# Altium PCB PCB_HBridge.PcbDoc
Units mm, origin at the board's own origin, x right, y up, seen from the top; angles counter-clockwise.
Board outline 66.04 x 61.85 mm, 2 copper layers (Top Layer, Bottom Layer); 46 components, 32 nets, 139 pads, 137 vias.
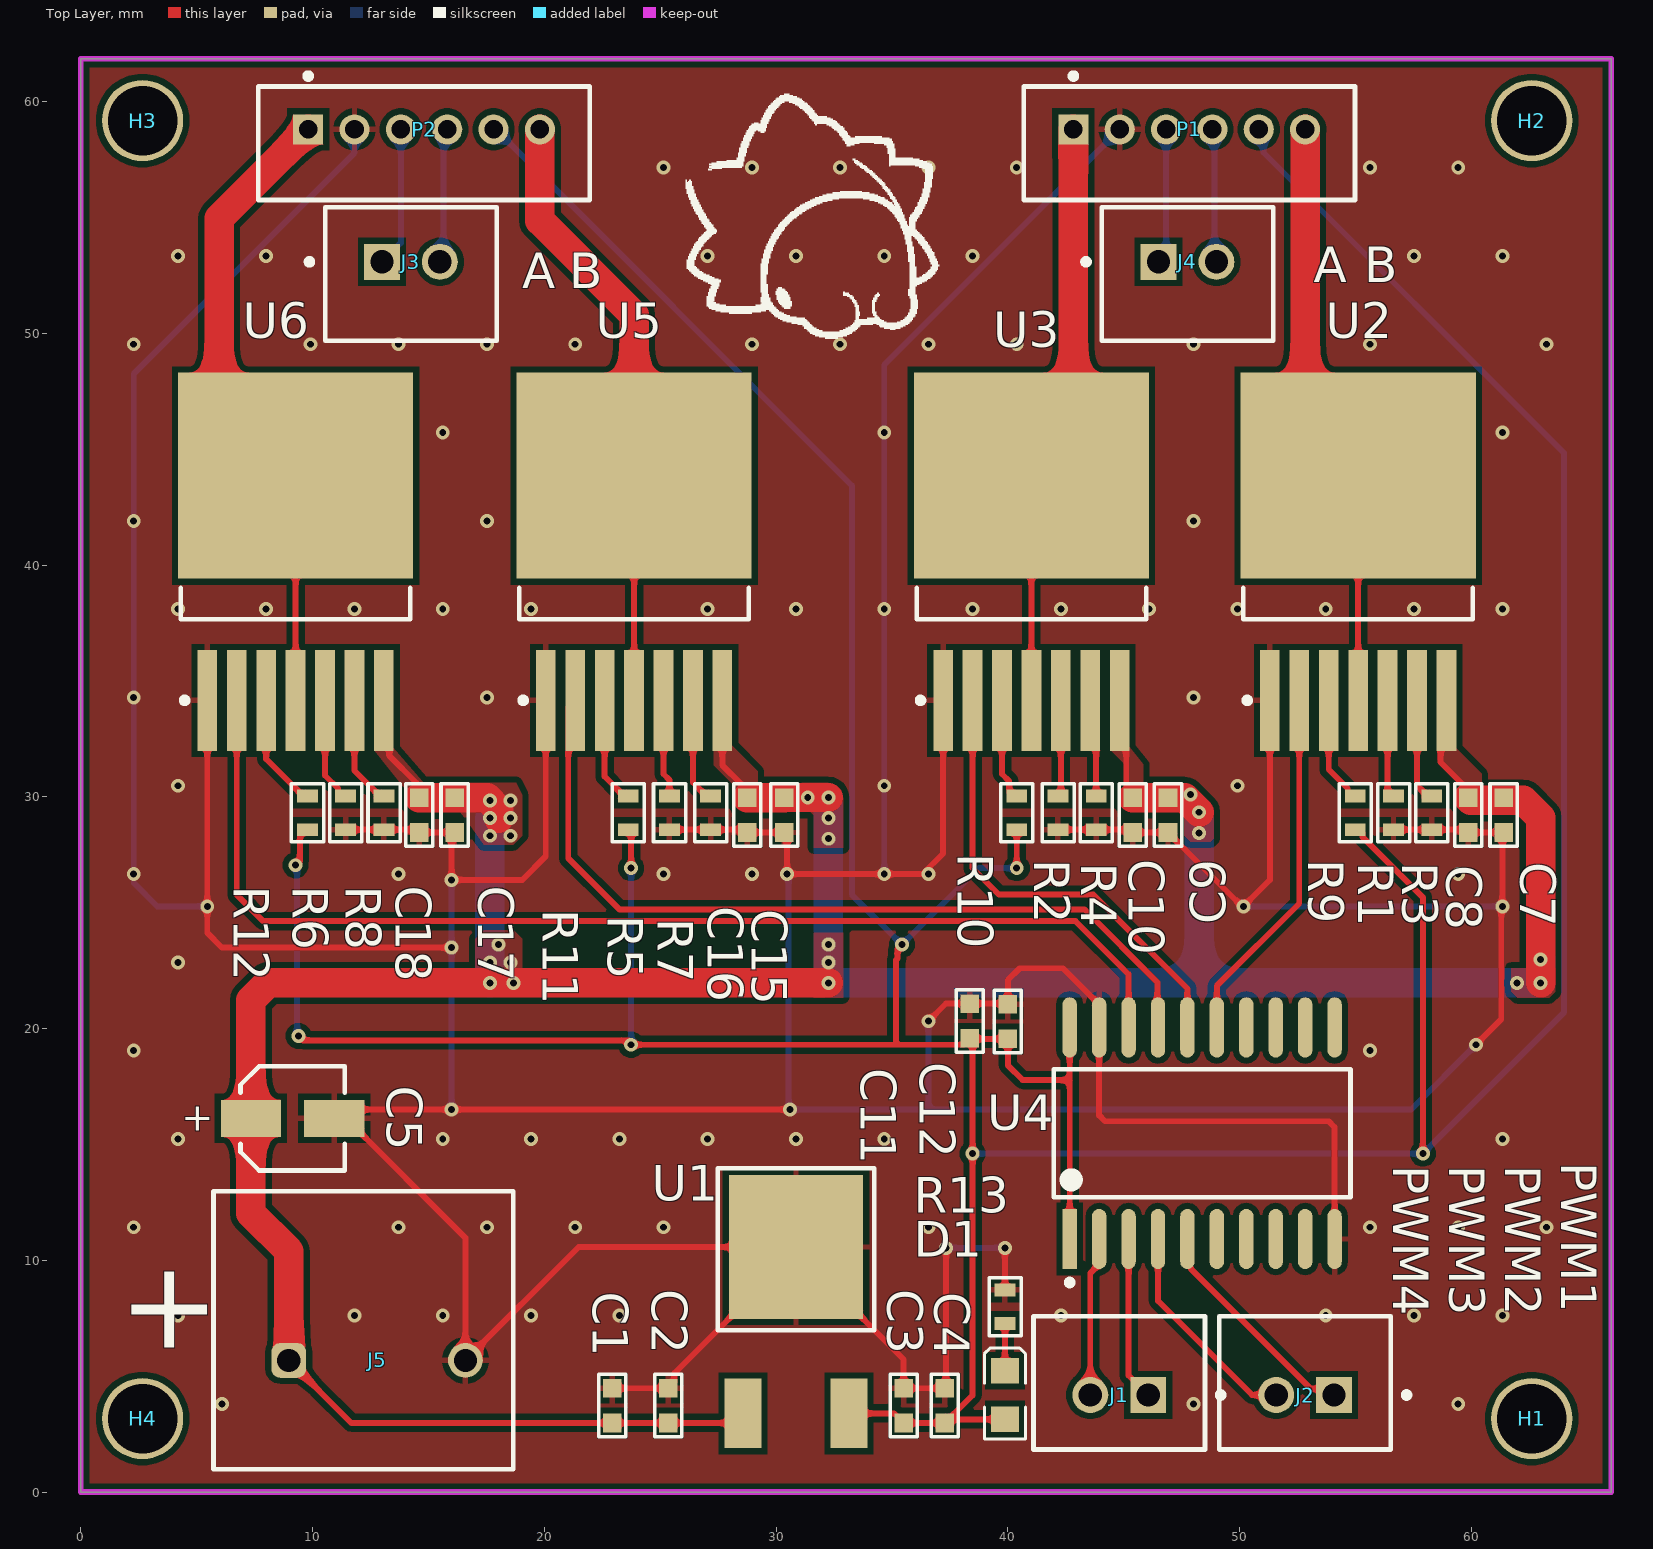
[diagram p0: Top Layer view]
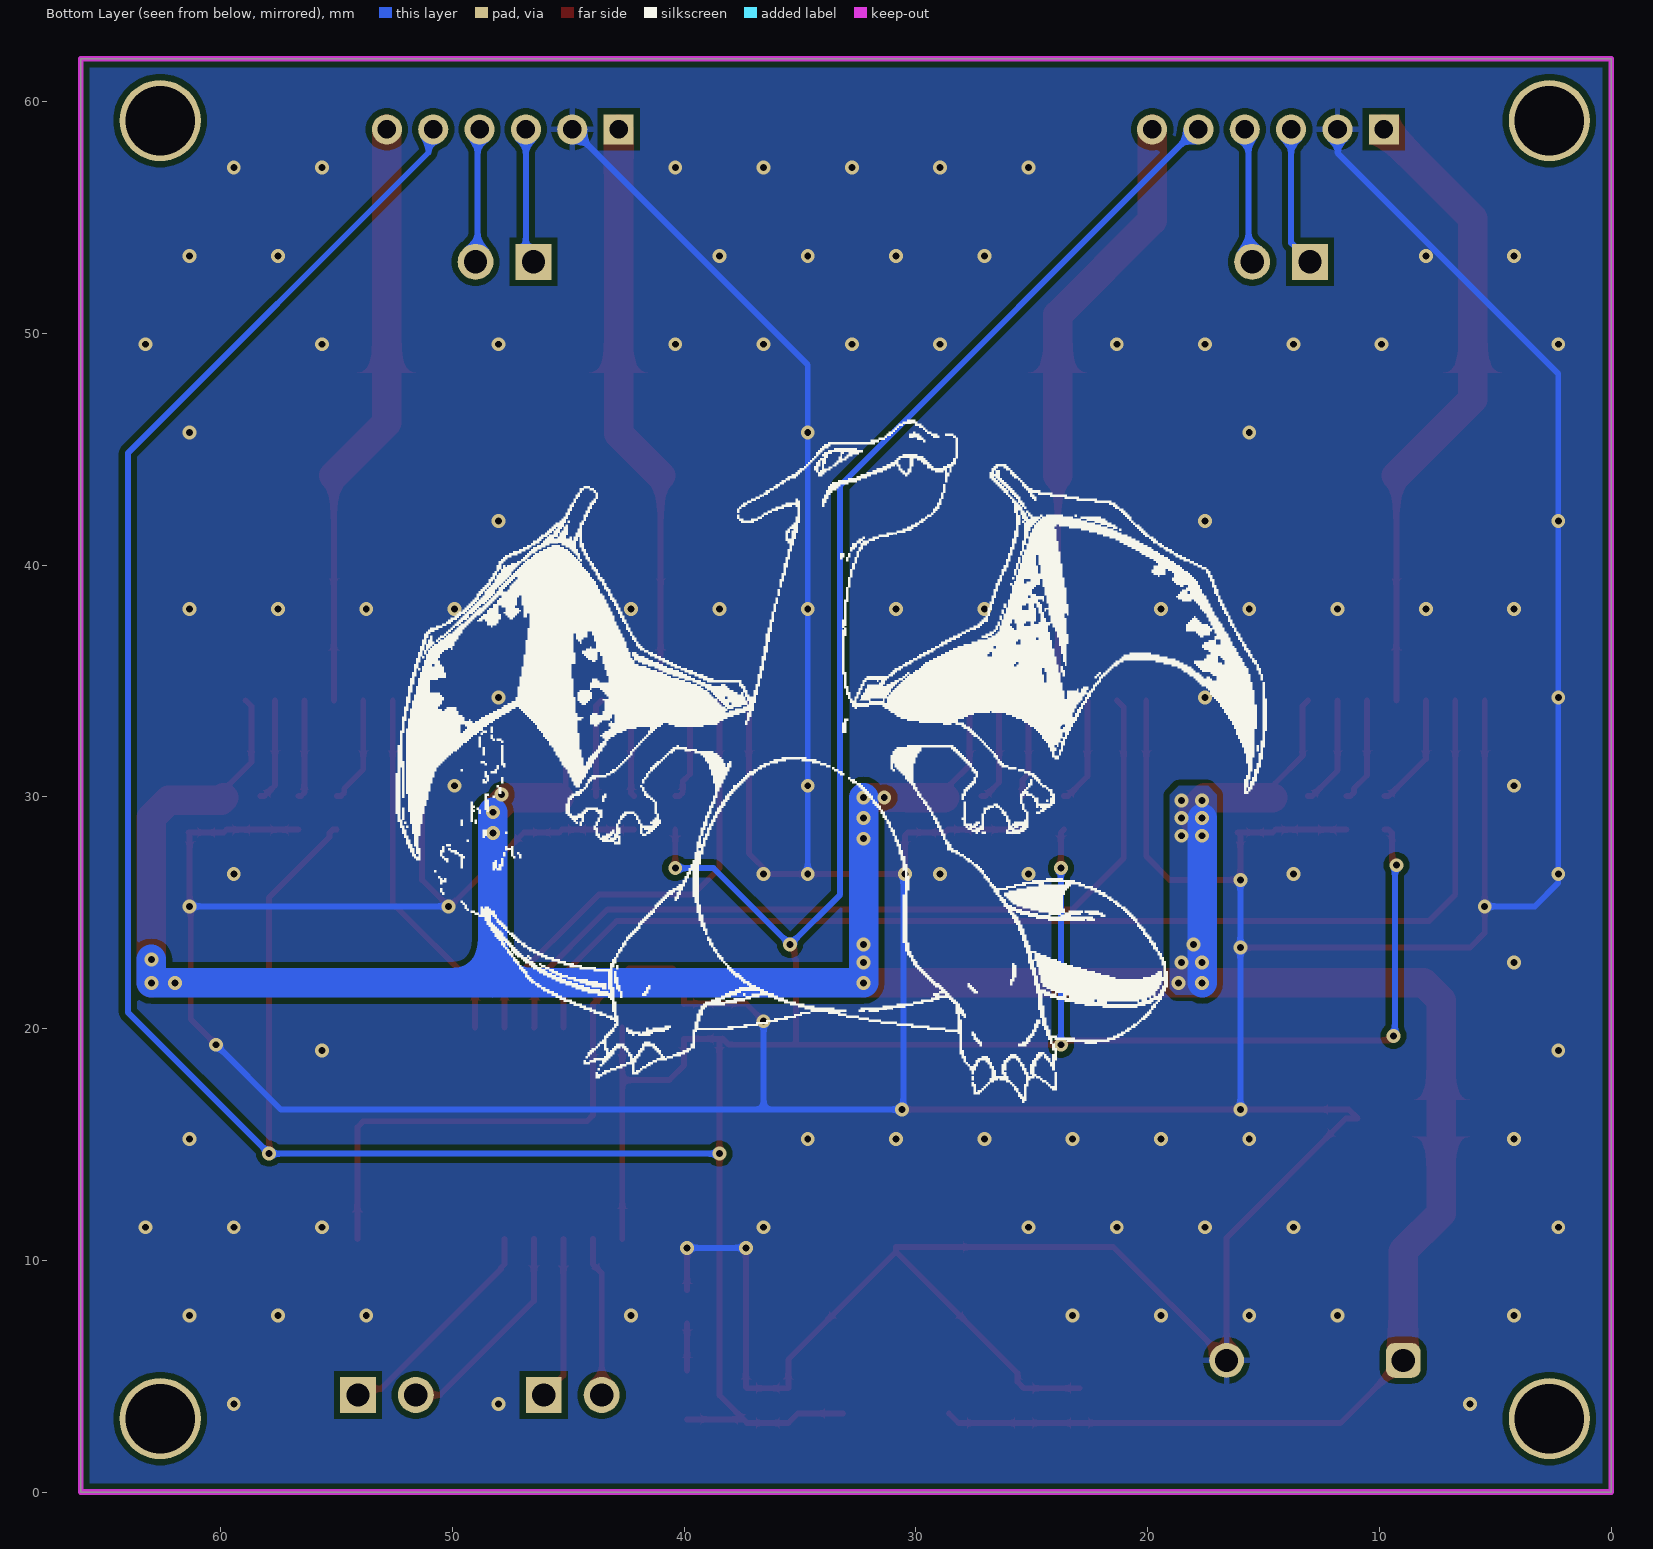
[diagram p1: Bottom Layer view, seen from below]
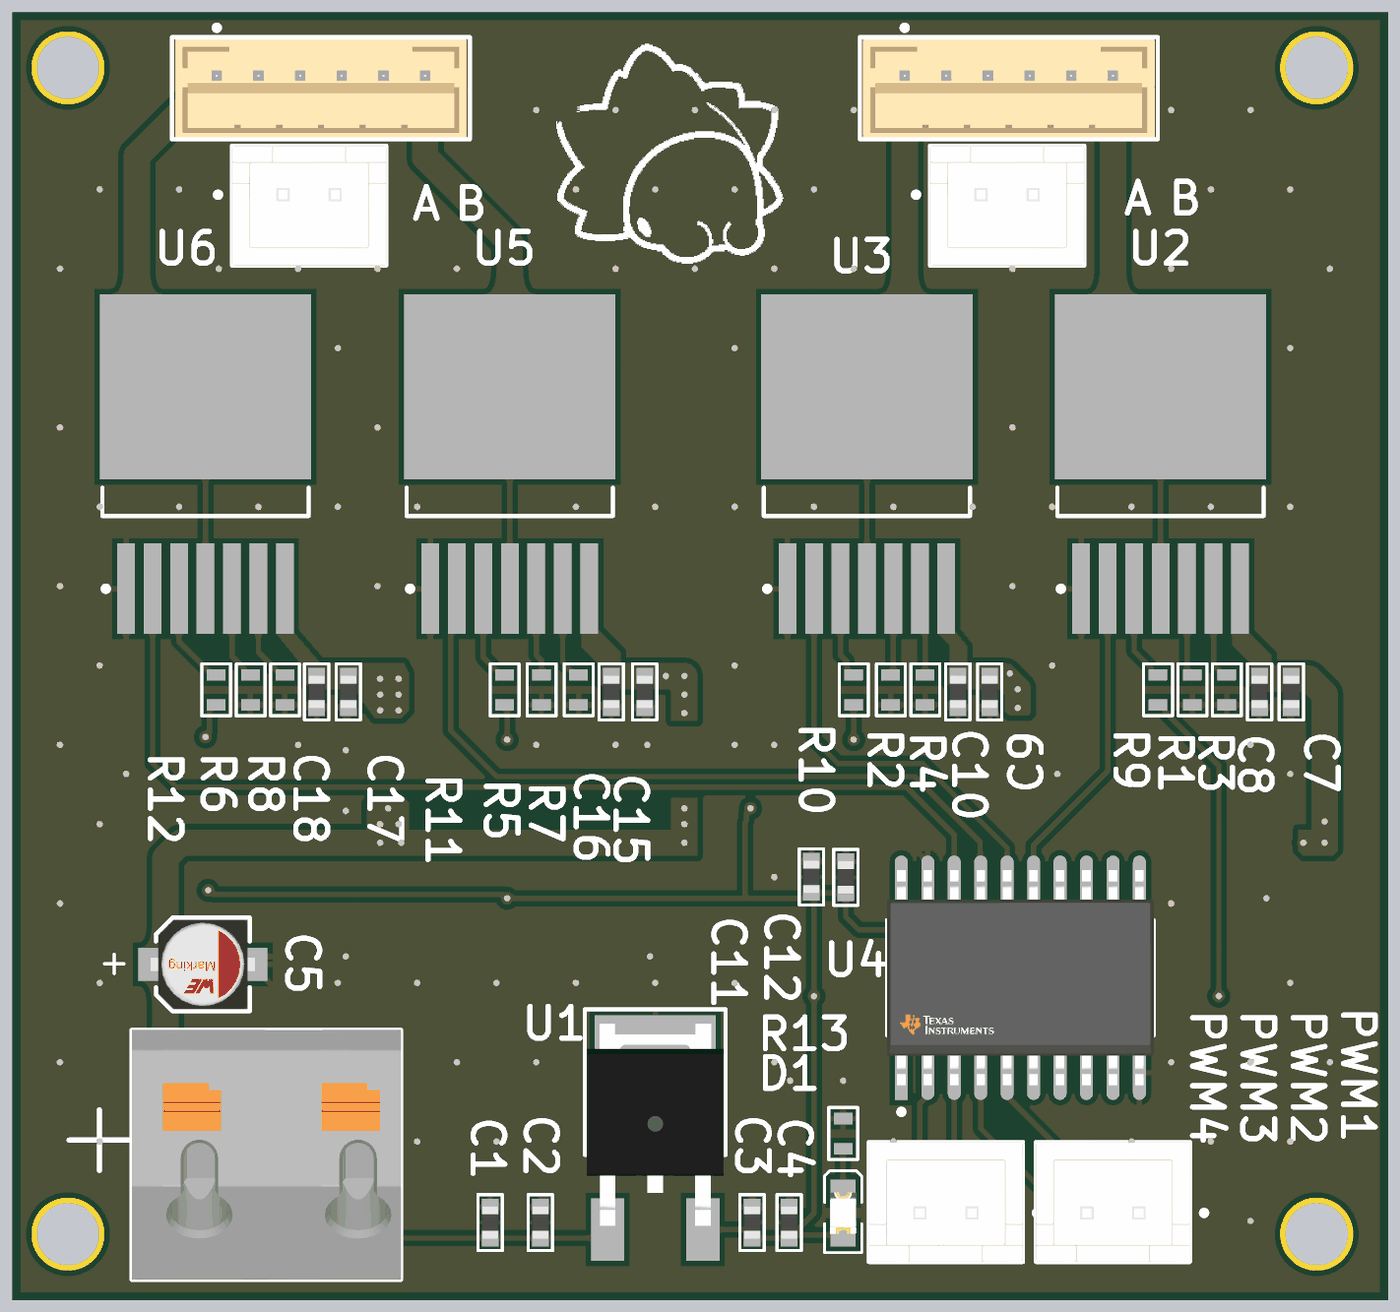
[diagram p2: 3D render of the assembled board from above, using the file's embedded part models]

## Layer stack, top to bottom
Top Solder: solder mask 0.0102, Solder Resist, Dk 3.5
Top Layer: signal copper 0.0356
Dielectric 1: dielectric 0.32, FR-4, Dk 4.8
Bottom Layer: signal copper 0.0356
Bottom Solder: solder mask 0.0102, Solder Resist, Dk 3.5

## Board outline
0,0 0,61.849 66.04,61.849 66.04,0

## Design rules (kind name [scope] priority, off if disabled: settings)
Clearance [All] p1: gap=0.254 ignorepadtopadclearanceinfootprint=FALSE except(0: Arc-Hole Track-Hole SMDPad-Hole THPad-Hole Via-Hole Fill-Hole Poly-Hole Region-Hole Text-Hole)
PolygonConnect [All] p1: thpad.connectstyle=Relief thpad.reliefconductorwidth=0.254 thpad.reliefentries=4 thpad.polygonreliefangle="90 Angle" thpad.airgapwidth=0.254 smdpad.connectstyle=Relief smdpad.reliefconductorwidth=0.254 smdpad.reliefentries=4 smdpad.polygonreliefangle="90 Angle" smdpad.airgapwidth=0.254 via.connectstyle=Direct via.reliefconductorwidth=0.254 via.reliefentries=4 via.polygonreliefangle="90 Angle" via.airgapwidth=0.254
RoutingVias [All] p1: holewidth=0.711 width=1.27 viastyle="Through Hole" minholewidth=0.711 minwidth=1.27 maxholewidth=0.711 maxwidth=1.27
SolderMaskExpansion Via [IsVia] p1: expansion=0.102 istentingtop=TRUE
Width [All] p1: maxlimit=1.27 minlimit=0.254 preferedwidth=0.254 minimp=50.000000 maximp=50.000000 favimp=50.000000
30 further rules are at their usual default settings.

## Components (designator, comment, footprint, x,y, rotation, side; value= is the part's Value field where it differs from the comment)
C1 "1 nF, 50 VDC" CAP_0603 22.86,3.683 r270 top
C2 "100 nF, 50 VDC" CAP_0603 25.273,3.683 r270 top
C3 "100 nF, 50 VDC" CAP_0603 35.433,3.683 r270 top
C4 "1 nF, 50 VDC" CAP_0603 37.211,3.683 r270 top
C5 "470nF" WCAP-ASLU_D4H5.5 9.144,16.129 r180 top
C7 "1 nF, 50 VDC" CAP_0603 61.468,29.264 r90 top
C8 "100 nF, 50 VDC" CAP_0603 59.944,29.264 r90 top
C9 "1 nF, 50 VDC" CAP_0603 46.99,29.264 r90 top
C10 "100 nF, 50 VDC" CAP_0603 45.466,29.264 r90 top
C11 "1 nF, 50 VDC" CAP_0603 38.278,20.281 r270 top
C12 "100 nF, 50 VDC" CAP_0603 39.929,20.257 r270 top
C15 "1 nF, 50 VDC" CAP_0603 30.429,29.264 r90 top
C16 "100 nF, 50 VDC" CAP_0603 28.829,29.264 r90 top
C17 "1 nF, 50 VDC" CAP_0603 16.205,29.264 r90 top
C18 "100 nF, 50 VDC" CAP_0603 14.681,29.264 r90 top
D1 "LED SMD" LED_0805_Blue 39.878,4.191 r90 top
H1 "Hole" "LO KHOAN 3MM" 62.611,3.175 r0 top
H2 "Hole" "LO KHOAN 3MM" 62.611,59.182 r0 top
H3 "Hole" "LO KHOAN 3MM" 2.667,59.182 r0 top
H4 "Hole" "LO KHOAN 3MM" 2.667,3.175 r0 top
J1 "B2B-XH-A(LF)(SN)" FP-B2B-XH-A_LF_SN-MFG 44.811,4.716 r180 top
J2 "B2B-XH-A(LF)(SN)" FP-B2B-XH-A_LF_SN-MFG 52.832,4.716 r180 top
J3 "B2B-XH-A(LF)(SN)" FP-B2B-XH-A_LF_SN-MFG 14.244,52.561 r0 top
J4 "B2B-XH-A(LF)(SN)" FP-B2B-XH-A_LF_SN-MFG 47.752,52.561 r0 top
J5 "4A, 300V" 691418420002 12.192,6.985 r0 top
P1 "2A, 125V(AC)" 62000611622 47.832,58.201 r180 top
P2 "2A, 125V(AC)" 62000611622 14.812,58.201 r180 top
R1 "1 KOhm, 1/4 W" resistor_0603 56.642,29.309 r270 top
R2 "1 KOhm, 1/4 W" resistor_0603 42.164,29.309 r270 top
R3 "1 KOhm, 1/4 W" resistor_0603 58.293,29.309 r270 top
R4 "1 KOhm, 1/4 W" resistor_0603 43.815,29.309 r270 top
R5 "1 KOhm, 1/4 W" resistor_0603 25.4,29.309 r270 top
R6 "1 KOhm, 1/4 W" resistor_0603 11.43,29.309 r270 top
R7 "1 KOhm, 1/4 W" resistor_0603 27.178,29.309 r270 top
R8 "1 KOhm, 1/4 W" resistor_0603 13.081,29.309 r270 top
R9 "1 KOhm, 1/4 W" resistor_0603 54.991,29.309 r270 top
R10 "1 KOhm, 1/4 W" resistor_0603 40.386,29.309 r270 top
R11 "1 KOhm, 1/4 W" resistor_0603 23.622,29.309 r270 top
R12 "1 KOhm, 1/4 W" resistor_0603 9.779,29.309 r270 top
R13 "1K" resistor_0603 39.878,8.001 r270 top value="21 KOhm, 1/4 W"
U1 "5V, 500mA" TO-252 30.861,6.985 r90 top
U2 "BTS7960B" INF-P-TO-263-7-6_M 55.118,40.163 r90 top
U3 "BTS7960B" INF-P-TO-263-7-6_M 41.021,40.163 r90 top
U4 "SN74HC245DWR" FP-DW0020A-IPC_A 48.387,15.487 r90 top
U5 "BTS7960B" INF-P-TO-263-7-6_M 23.876,40.163 r90 top
U6 "BTS7960B" INF-P-TO-263-7-6_M 9.271,40.163 r90 top

## Footprints (in the part's own frame and the unit in brackets; to place one, negate y for a bottom-side part, rotate by r counter-clockwise, add the part's x,y. Pads: shape width x height; smd on the part's side, far side on the other; paste and mask are expansions set on the pad)
62000611622 [mm] "2.00mm Male Vertical Shrouded Header, 6p"
  rect 1.3x1.3 hole 0.8: 1(5,-0.6)
  round 1.3 hole 0.8: 2(3,-0.6) 3(1,-0.6) 4(-1,-0.6) 5(-3,-0.6) 6(-5,-0.6)
  silkscreen extent -7.15,-3.02 7.15,2.45, body extent -7,-2.35 7,2.35, height 6.13
691418420002 [mm] "7.62 mm 45deg Entry Screwless, 2p"
  rrect50% 1.5x1.5 hole 1: 1(-3.215,-1.3)
  round 1.5 hole 1: 2(4.405,-1.3)
  silkscreen extent -6.47,-6 6.46,6, body extent -6.46,-6 6.47,6, height 13.28
CAP_0603 [mm]
  rect 0.8x0.8 smd: 1(-0.801,0.076) 2(0.699,0.076)
  silkscreen extent -1.4,-0.51 1.3,0.66, body extent -0.85,-0.32 0.75,0.48, height 0.8
FP-B2B-XH-A_LF_SN-MFG [mm]
  rect 1.55x1.55 hole 1 paste-1000 mask+0: 1(-1.25,0.525)
  round 1.55 hole 1 paste-1000 mask+0: 2(1.25,0.525)
  silkscreen extent -4.5,-2.88 3.7,2.88, body extent -3.8,-2.98 3.8,2.98, height 0.25
FP-DW0020A-IPC_A [mm]
  rect 2.603x0.622 smd paste+0 mask+0: 1(-4.565,5.715)
  rrect100% 2.603x0.622 smd paste+0 mask+0: 2(-4.565,4.445) 3(-4.565,3.175) 4(-4.565,1.905) 5(-4.565,0.635) 6(-4.565,-0.635) 7(-4.565,-1.905) 8(-4.565,-3.175) 9(-4.565,-4.445) 10(-4.565,-5.715) 11(4.565,-5.715) 12(4.565,-4.445) 13(4.565,-3.175) 14(4.565,-1.905) 15(4.565,-0.635) 16(4.565,0.635) 17(4.565,1.905) 18(4.565,3.175) 19(4.565,4.445) 20(4.565,5.715)
  silkscreen extent -6.57,-6.4 2.76,6.4, body extent -6.37,-6.9 6.37,6.9, height 0.25
INF-P-TO-263-7-6_M [mm] "DPAK, 7-Leads, Body 9.9x9.2mm, Pitch 1.27mm, IPC Low Density"
  rect 4.35x0.85 smd: 1(-6,3.81) 2(-6,2.54) 3(-6,1.27) 4(-6,0) 5(-6,-1.27) 6(-6,-2.54) 7(-6,-3.81)
  rect 8.9x10.15 smd: 8(3.7,0)
  silkscreen extent -6.12,-4.95 -1.15,4.95, body extent -2.5,-4.95 6.9,4.95, height 4.5
LED_0805_Blue [mm]
  rect 1.1x1.2 smd: 1(-1.05,0) 2(1.05,0)
  silkscreen extent -1.91,-0.89 2.03,0.89, body extent -1,-0.63 1,0.62, height 0.68
"LO KHOAN 3MM" [mil]
  round 138 hole 118.1: 1(0,0)
resistor_0603 [mm]
  rect 0.55x0.9 smd: 1(-0.725,0) 2(0.725,0)
  silkscreen extent -1.25,-0.69 1.24,0.7, body extent -0.8,-0.45 0.8,0.45, height 0.5
TO-252 [mm] "D-PAK"
  rect 3x1.6 smd: 1(-3.59,2.286) 2(-3.59,-2.286)
  rect 6.2x5.8 smd: 3(3.59,0)
  silkscreen extent 0,-3.38 6.98,3.38, body extent -3.41,-3.29 6.29,3.29, height 2.3
WCAP-ASLU_D4H5.5 [mm] "Aluminum Electrolytic Capacitors, body diameter 4mm"
  rect 2.6x1.6 smd: 1(1.8,0) 2(-1.8,0)
  silkscreen extent -2.25,-2.25 2.25,2.25, body extent -2.5,-2.15 2.5,2.15, height 5.5

## Part data
C1 C4 C7 C9 C11 C15 C17: library part 0106031020550, "CAP, size 0603, 1 nF, 50 VDC", Capacitance="1 nF", Manufacture Name=TDK, Manufacture SN=CGA3E2NP01H102J080AA, Operating Temperature="-55 to +125degC", Tolerance=+/-5%, Voltage Rating DC="50 VDC", ComponentLink2Description=Datasheet, ComponentLink2URL=https://product.tdk.com/system/files/dam/doc/product/capacitor/ceramic/mlcc/catalog/mlcc_automotive_hightemp_en.pdf?ref_disty=mouser, Mounting Technology=SMT, Packaging="Tape and Reel", Size=0603, Supplier 1 Name=Mouser, Supplier 1 SN=810-CGA3E2NP01H102JA, Supplier 1 URL=https://www.mouser.com/ProductDetail/TDK/CGA3E2NP01H102J080AA?qs=xLDY6iXSiQaozl9q8leaqQ%3D%3D&utm_source=mouser-refine-download&utm_medium=file&utm_campaign=CGA3E2NP01H102J080AA&utm_content=TDK, Supplier 2 Name=Digi-Key, Supplier 2 SN=445-12385-2-ND, Supplier 2 URL=https://www.digikey.com/en/products/detail/tdk-corporation/cga3e2np01h102j080aa/3949621, Supplier 3 Name=thegioiic, Supplier 3 SN=N/A, Supplier 3 URL=N/A
C2 C3 C8 C10 C12 C16 C18: library part 0106031041050, "CAP, size 0603, 100 nF, 50 VDC", Capacitance="100 nF", Manufacture Name=TDK, Manufacture SN=CGA3E3X8R1H104K080AE, Operating Temperature="-55 to +125degC", Tolerance=+/-10%, Voltage Rating DC="50 VDC", ComponentLink2Description=Datasheet, ComponentLink2URL=https://product.tdk.com/system/files/dam/doc/product/capacitor/ceramic/mlcc/catalog/mlcc_automotive_soft_en.pdf?ref_disty=mouser, Mounting Technology=SMT, Packaging="Tape and Reel", Size=0603, Supplier 1 Name=Mouser, Supplier 1 SN=810-CGA3E3X8R1H104KA, Supplier 1 URL=https://www.mouser.com/ProductDetail/TDK/CGA3E3X8R1H104K080AE?qs=nQSIdc08i%252Bd8g3IRRgU2bw%3D%3D&utm_source=mouser-refine-download&utm_medium=file&utm_campaign=CGA3E3X8R1H104K080AE&utm_content=TDK, Supplier 2 Name=Digi-Key, Supplier 2 SN=445-173697-2-ND, Supplier 2 URL=https://www.digikey.com/en/products/detail/tdk-corporation/cga3e3x8r1h104k080ae/5809262, Supplier 3 Name=thegioiic, Supplier 3 SN=N/A, Supplier 3 URL=N/A
C5: library part CMP-03913-53914652-1, "865090640004 WCAP-ASLU Aluminum Electrolytic Capacitors", Case/Package=Radial, Insulation Resistance=16.6667MΩ, Leakage Current=400nA, Max Operating Temperature=85°C, Min Operating Temperature=-40°C, Ripple Current=4mA, Tolerance=20%, Voltage Rating=50V, Capacitance=470nF, Diameter=4mm, Height=5.5mm, Height - Seated (Max)=5.5118mm, Length=5.5mm, Life (Hours)=1000hours, Material=Aluminium, Mount="Surface Mount", NexarPartId=53914652, Packaging="Tape & Reel (TR)", Polarity=Polar, REACH SVHC=Unknown, Ripple Current (AC)=4mA, RoHS=Compliant, Voltage Rating (DC)=50V, Width=4.3mm
D1: "LED"
H1 H2 H3 H4: "Hole 3mm"
J1 J2 J3 J4: library part CMP-2000-05888-3, "CONN HEADER VERT 2POS 2.5MM", Color=Natural, Contact Resistance=20mR, Current Rating=3A, Housing Color=White, Insulation Resistance=1GR, Max Operating Temperature=85°C, Max Voltage Rating (AC)=250V, Min Operating Temperature=-25°C, Connector Type="Male Pin", Contact Material=Brass, Contact Plating=Tin, Contact Type="Male Pin", Depth=5.75mm, Fastening Type=Detent, Housing Material=Polyamide, Lead Free="Lead Free", Lead Pitch=2.5mm, Length=7.4mm, Max Current Rating=3A, Max Voltage Rating (DC)=250V, Mount="Through Hole", Number of Contacts=2, Number of Positions=2, Number of Rows=1, Orientation=Straight, Packaging=Bulk, Pitch=2.5mm, REACH SVHC="No SVHC", Series=XH, Termination=Solder, Voltage Rating=250V, Voltage Rating (AC)=250V, Wire/Cable Gauge=22AWG
J5: library part 691418420002, "WR-TBL Series 4184 45° Entry, THT, pitch 7.62mm, 2p", Manufacturer="Wurth Elektronik", Operating Temperature Max=120°C, Operating Temperature Min=-30°C, Rated Current=4A, Working Voltage=300V, Application=Screwless, Category="Terminal Blocks", ComponentLink1Description="Datasheet Link", ComponentLink1URL=https://www.we-online.com/redexpert/spec/691418420002?ad, ComponentLink2Description="Supplier 1 URL", ComponentLink2URL=N/A, ComponentLink3Description="Supplier 2 URL", ComponentLink3URL=N/A, ComponentLink4Description="Supplier 3 URL", ComponentLink4URL=https://www.thegioiic.com/hb762-2-terminal-khoi-han-pcb-2-cuc-24a-450v-7-62mm, Manufacturer Part Number=691418420002, Match Code=WR-TBL, Modularity=No, Mount="Through Hole", Number of Pins=2, Number of Rows=1, Orientation=45°, Packaging=Box, Pitch=7.62mm, Supplier 1 Name=Mouser, Supplier 1 SN=N/A, Supplier 1 URL=N/A, Supplier 2 Name=Digi-Key, Supplier 2 SN=N/A, Supplier 2 URL=N/A, Supplier 3 Name=thegioiic, Supplier 3 SN=N/A, Supplier 3 URL=https://www.thegioiic.com/hb762-2-terminal-khoi-han-pcb-2-cuc-24a-450v-7-62mm
P1 P2: library part 62000611622, "WR-WTB Male Vertical Shrouded Header, pitch 2mm, 6p", Contact Resistance=20mOhm, Operating Temperature="-25 to +85degC", Rated Current=2A, Withstanding Voltage=800VAC, Working Voltage=125VAC, ComponentLink1Description=Manufacturer, ComponentLink1URL=http://www.we-online.de, ComponentLink2Description=Datasheet, ComponentLink2URL=https://www.we-online.com/catalog/datasheet/62000611622.pdf, ComponentLink3Description="Global Supply", ComponentLink3URL=https://www.we-online.com/en/components/products/WTB_2_00_MALE_VERTICAL_SHROUDED_HEADER_6200XX11622?sq=62000611622#62000611622, ComponentLink4Description="Global Supply", ComponentLink4URL=https://www.mouser.vn/ProductDetail/Wurth-Elektronik/62000611622?qs=ulEaXIWI0c%2F38WR3e0VejA%3D%3D, Gender=Male, Mounting Technology=THT, Packaging=Bag, Part Number=62000611622, Pin Number=6, Pitch=2mm, Published Date="January 2020", Publisher="Wurth Elektronik", Supplier 1 Name=Mouser, Supplier 1 SN=710-62000611622, Supplier 1 URL=https://www.mouser.vn/ProductDetail/Wurth-Elektronik/62000611622?qs=ulEaXIWI0c%2F38WR3e0VejA%3D%3D, Supplier 2 Name=Digi-Key, Supplier 2 SN=N/A, Supplier 2 URL=N/A, Supplier 3 Name=thegioiic, Supplier 3 SN=N/A, Supplier 3 URL=N/A, Type=Vertical
R1 R2 R3 R4 R5 R6 R7 R8 R9 R10 R11 R12: library part 0006031021, "RES, size 0603, 1 KOhm, 1/4 W", Manufacture  Name=OEM, Rated Power="1/4 W", Resistance="1 KOhm", Resistance Tolerance=+/-1%, ComponentLink1Description="Datasheet link", ComponentLink1URL=https://www.yageo.com/upload/media/product/productsearch/datasheet/rchip/PYu-SR_20105_RoHS_L_10.pdf, ComponentLink2Description="Supplier 1 URL", ComponentLink2URL=N/A, ComponentLink3Description="Supplier 2 URL", ComponentLink3URL=https://www.digikey.com/en/products/detail/yageo/SR0603FR-7T1KL/9373103, ComponentLink4Description="Supplier 3 URL", ComponentLink4URL=N/A, Manufacture  SN=OEM, Mounting Technology=SMT, Size=0603, Supplier 1 Name=Mouser, Supplier 1 SN=71-RCS06031K00FKEA, Supplier 1 URL=https://www.mouser.vn/ProductDetail/Vishay-Dale/RCS06031K00FKEA?qs=sGAEpiMZZMvdGkrng054t9clqp6gtJJdzI9PGMrTQi4RTIuHToNahw%3D%3D, Supplier 2 Name=Digi-Key, Supplier 2 SN="YAG5829TR-ND YAG5829CT-ND YAG5829DKR-ND", Supplier 2 URL=https://www.digikey.com/en/products/detail/yageo/SR0603FR-7T1KL/9373103, Supplier 3 Name=thegioiic, Supplier 3 SN=N/A, Supplier 3 URL=N/A
R13: library part 0006032135, "RES, size 0603, 21 KOhm, 1/4 W", Manufacture  Name=OEM, Rated Power="1/4 W", Resistance="21 KOhm", Resistance Tolerance=+/-5%, ComponentLink1Description="Datasheet link", ComponentLink1URL=N/A, ComponentLink2Description="Supplier 1 URL", ComponentLink2URL=N/A, ComponentLink3Description="Supplier 2 URL", ComponentLink3URL=N/A, ComponentLink4Description="Supplier 3 URL", ComponentLink4URL=N/A, Manufacture  SN=OEM, Mounting Technology=SMT, Size=0603, Supplier 1 Name=Mouser, Supplier 1 SN=N/A, Supplier 1 URL=N/A, Supplier 2 Name=Digi-Key, Supplier 2 SN=N/A, Supplier 2 URL=N/A, Supplier 3 Name=thegioiic, Supplier 3 SN=N/A, Supplier 3 URL=N/A
U1: library part L78M05CDT_TO-252, "Out: 5V, 500mA; In: 7V to 35V; Pacakge: TO-252", Output Current=500mA, Package=TO-252, Voltage Input Maximum="7V to 35V", Voltage Output=5V, ComponentLink1Description="Datasheet link", ComponentLink1URL=https://www.mouser.com/datasheet/2/389/l78m-1849664.pdf, ComponentLink2Description="Supplier 1 URL", ComponentLink2URL=https://www.mouser.com/ProductDetail/STMicroelectronics/L78M05CDT?qs=EYQuxaDwR79rnNxSL0UEZA%3D%3D, ComponentLink3Description="Supplier 2 URL", ComponentLink3URL=https://www.digikey.com/en/products/detail/stmicroelectronics/L78M05CDT/634720, ComponentLink4Description="Supplier 3 URL", ComponentLink4URL=https://www.thegioiic.com/l78m05cdt-ic-on-ap-5v-500ma, Supplier 1 Name=Mouser, Supplier 1 SN=511-L78M05CDT, Supplier 1 URL=https://www.mouser.com/ProductDetail/STMicroelectronics/L78M05CDT?qs=EYQuxaDwR79rnNxSL0UEZA%3D%3D, Supplier 2 Name=Digi-Key, Supplier 2 SN=497-2956-5-ND, Supplier 2 URL=https://www.digikey.com/en/products/detail/stmicroelectronics/L78M05CDT/634720, Supplier 3 Name=thegioiic, Supplier 3 SN=N/A, Supplier 3 URL=https://www.thegioiic.com/l78m05cdt-ic-on-ap-5v-500ma
U2 U3 U5 U6: library part CMP-1114-00025-1, "High Current PN Half Bridge NovalithIC, -40 to 150 degC, P-TO-263-7-6", Manufacturer=Infineon, ComponentLink1Description="Manufacturer URL", ComponentLink1URL=http://www.infineon.com/, ComponentLink2Description=Datasheet, ComponentLink2URL=http://www.infineon.com/dgdl/BTS7960_Datasheet.pdf?folderId=db3a304412b407950112b408e8c90004&fileId=db3a304412b407950112b43945006d5d&location=en.Products.Automotive_ICs.Motor_Drivers__Automotive_.Integrated_High_Current_Motor_Drivers__NovalithIC____Trilith, ComponentLink3Description="Package Specification", ComponentLink3URL=http://www.infineon.com/dgdl/BTS7970B_Datasheet.pdf?folderId=db3a304412b407950112b408e8c90004&fileId=db3a304412b407950112b43949b36d61&sId=db3a30433d68e984013d7db637dc5e6a, DatasheetVersion="Rev. 1.1", Green=FALSE, Halogen-free=FALSE, Iq (typ)="7 uA", Mounting Technology="Surface Mount", PackageDescription="7-Pin Plastic Transistor Single Outline Package, 9.9 x 9.2 mm Body, 1.27 mm Pitch", PackageReference=P-TO-263-7-6, PackageVersion=May-06, PartNumber=BTS7960B, RevisionNote="Re-Activated Devices"
U4: library part CMP-1620-00193-3, "IC TRANSCVR NON-INVERT 6V 20SOIC", Case/Package=SOIC, High Level Output Current=-7.8mA, Low Level Output Current=7.8mA, Max Operating Temperature=85°C, Max Supply Voltage=6V, Min Operating Temperature=-40°C, Min Supply Voltage=2V, Operating Supply Voltage=5V, Package Quantity=1, Quiescent Current=8uA, Contact Plating=Gold, Direction=Bidirectional, Height=2.35mm, Lead Free="Lead Free", Length=12.8mm, Logic Function=Transceiver, Mount="Surface Mount", Number of Bits=8, Number of Bits per Element=8, Number of Channels=8, Number of Circuits=8, Number of Elements=1, Number of Outputs=8, Number of Pins=20, Packaging="Tape and Reel", Polarity=Non-Inverting, Propagation Delay=335ns, Radiation Hardening=No, REACH SVHC="No SVHC", RoHS Compliant=Yes, Turn-On Delay Time=335ns, Weight=0.017662oz, Width=7.52mm

## Via types
v1: diameter 0.6, hole 0.3, Top Layer to Bottom Layer, tented both sides, 137 vias

## Nets (pads, with @x,y where several pads share a name; then routed paths per layer and width w, separated by ;. In a path a pad name is that pad's centre, name@x,y a point inside that pad or via, vN(x,y) a via of type N, cw(c..) or ccw(c..) an arc to the next point about the centre after c; other vN are vias at no path point)
5V: C3.2 C4.2 C11.2 C12.2 D1.1 P1.5 P2.5 R9.2 R10.2 R11.2 R12.2 U1.2 U4.1 U4.20 | length 228.3
  Top Layer w0.254: v1(9.271,27.051) 9.456,27.236 9.456,28.436 9.604,28.584 R12.2 ; v1(9.398,19.685) 9.588,19.494 23.558,19.494 v1(23.749,19.304) 35.306,19.304 ; R11.2 23.749,28.457 v1(23.749,26.924) ; U1.2 35.098,3.395 C3.2 C4.2 C4.2@37.444,3.141 ; v1(35.433,23.622) 35.239,23.428 35.239,23.025 35.179,22.965 35.179,19.431 35.306,19.304 ; C11.2 38.081,19.309 37.937,19.309 37.932,19.304 35.306,19.304 ; C11.2@38.378,19.558 C12.2 40.005,18.415 40.64,17.78 42.672,17.78 ; C11.2@38.481,19.455 v1(38.481,14.605) 38.481,4.178 C4.2@37.444,3.141 ; D1.1 C4.2@37.444,3.141 ; v1(40.386,26.924) R10.2 ; U4.1 42.672,17.78 ; U4.20 42.672,17.78 ; R9.2 55.166,28.584 55.314,28.436 55.314,28.261 57.912,25.663 v1(57.912,14.605)
  Bottom Layer w0.254: v1(9.271,27.051) 9.335,26.987 9.335,19.748 v1(9.398,19.685) ; P2.5 17.907,58.801 33.274,43.434 33.274,25.781 v1(35.433,23.622) 38.735,26.924 v1(40.386,26.924) ; v1(23.749,19.304) v1(23.749,26.924) ; v1(38.481,14.605) v1(57.912,14.605) 64.008,20.701 64.008,44.831 51.032,57.807 51.032,58.601 P1.5
GND: C1.1 C2.1 C3.1 C4.1 C5.2 C7.1 C8.1 C9.1 C10.1 C11.1 C12.1 C15.1 C16.1 C17.1 C18.1 J5.2 P1.2 P2.2 R1.2 R2.2 R3.2 R4.2 R5.2 R6.2 R7.2 R8.2 R13.1 U1.3 U2.1 U3.1 U4.10 U4.19 U5.1 U6.1 | length 344.5
  Top Layer w0.254: U6.1 v1(5.461,25.273) 5.461,24.13 6.096,23.495 v1(16.002,23.495) ; R6.2 R8.2 14.484,28.584 C18.1 C17.1 16.002,28.336 v1(16.002,26.416) 19.05,26.416 20.066,27.432 U5.1 ; C1.1 C2.1 25.622,4.757 25.622,5.136 U1.3@30.861,10.375 ; R5.2 R7.2 28.632,28.584 C16.1 C15.1 30.48,28.336 v1(30.48,26.67) v1(34.671,26.67) 36.322,26.67 37.211,27.559 U3.1 ; v1(30.607,16.51) v1(16.002,16.51) 11.325,16.51 C5.2 11.444,16.129 16.597,10.976 J5.2 21.487,10.575 U1.3 U1.3@30.861,10.375 ; v1(36.576,20.32) 37.338,21.082 C11.1 39.981,21.082 C12.1 40.005,22.098 40.513,22.606 42.379,22.606 43.942,21.043 U4.19 43.942,16.256 44.196,16.002 53.848,16.002 54.102,15.748 U4.10 ; v1(37.338,10.541) 37.338,4.535 C4.1 C3.1 35.509,5.727 U1.3@30.861,10.375 ; R13.1 v1(39.878,10.541) ; R2.2 R4.2 45.269,28.584 C10.1 C9.1 50.104,25.273 v1(50.165,25.273) 51.308,26.416 U2.1 ; R1.2 R3.2 59.747,28.584 C8.1 C7.1 61.341,28.412 61.341,25.324 61.392,25.273 61.295,25.176 61.295,20.401 v1(60.198,19.304)
  Bottom Layer w0.254: v1(5.461,25.273) 3.302,25.273 2.286,26.289 2.286,48.26 11.796,57.77 11.796,58.785 P2.2 ; v1(16.002,16.51) v1(16.002,23.495) v1(16.002,26.416) ; v1(30.48,26.67) 30.543,26.607 30.543,16.573 v1(30.607,16.51) 36.576,16.51 ; v1(34.671,26.67) 34.671,48.64 P1.2 ; v1(36.576,20.32) 36.576,16.51 ; v1(37.338,10.541) v1(39.878,10.541) ; v1(50.165,25.273) v1(61.341,25.273) ; v1(60.198,19.304) 57.404,16.51 36.576,16.51
  other v1: 6.096,3.81 48.006,3.81 59.436,3.81 4.191,7.62 11.811,7.62 15.621,7.62 19.431,7.62 23.241,7.62 42.291,7.62 53.721,7.62 57.531,7.62 61.341,7.62 2.286,11.43 13.716,11.43 17.526,11.43 21.336,11.43 25.146,11.43 36.576,11.43 55.626,11.43 59.436,11.43 63.246,11.43 4.191,15.24 15.621,15.24 19.431,15.24 23.241,15.24 27.051,15.24 30.861,15.24 34.671,15.24 61.341,15.24 2.286,19.05 55.626,19.05 4.191,22.86 2.286,26.67 13.716,26.67 25.146,26.67 28.956,26.67 36.576,26.67 59.436,26.67 4.191,30.48 34.671,30.48 49.911,30.48 2.286,34.29 17.526,34.29 48.006,34.29 4.191,38.1 8.001,38.1 11.811,38.1 15.621,38.1 19.431,38.1 27.051,38.1 30.861,38.1 34.671,38.1 38.481,38.1 42.291,38.1 46.101,38.1 49.911,38.1 53.721,38.1 57.531,38.1 61.341,38.1 2.286,41.91 17.526,41.91 48.006,41.91 15.621,45.72 34.671,45.72 61.341,45.72 2.286,49.53 9.906,49.53 13.716,49.53 17.526,49.53 21.336,49.53 28.956,49.53 32.766,49.53 36.576,49.53 40.386,49.53 48.006,49.53 55.626,49.53 63.246,49.53 4.191,53.34 8.001,53.34 27.051,53.34 30.861,53.34 34.671,53.34 38.481,53.34 57.531,53.34 61.341,53.34 25.146,57.15 28.956,57.15 32.766,57.15 36.576,57.15 40.386,57.15 55.626,57.15 59.436,57.15
NetD1_2: D1.2 R13.2 | length 2
  Top Layer w0.254: D1.2 R13.2
NetJ1_1: J1.1 U4.3 | length 7.1
  Top Layer w0.254: U4.3 45.212,5.04 J1.1
NetJ1_2: J1.2 U4.2 | length 6.9
  Top Layer w0.254: J1.2 43.561,9.451 43.942,9.832 U4.2
NetJ2_1: J2.1 U4.5 | length 9.8
  Top Layer w0.254: U4.5 47.752,9.832 47.911,9.673 47.911,9.62 53.075,4.456 53.817,4.456 J2.1
NetJ2_2: J2.2 U4.4 | length 9.5
  Top Layer w0.254: U4.4 46.482,8.255 50.546,4.191 J2.2
NetJ3_1: J3.1 P2.3 | length 6.1
  Bottom Layer w0.254: J3.1 13.812,53.904 P2.3
NetJ3_2: J3.2 P2.4 | length 5.8
  Bottom Layer w0.254: J3.2 15.653,53.245 15.653,58.642 P2.4
NetJ4_1: J4.1 P1.3 | length 5.9
  Bottom Layer w0.254: J4.1 46.832,53.416 P1.3
NetJ4_2: J4.2 P1.4 | length 5.8
  Bottom Layer w0.254: P1.4 48.917,58.716 48.917,53.171 J4.2
NetP1_1: P1.1 U3.4 U3.8 | length 25.4
  Top Layer w0.254: U3.4 U3.8
  Top Layer w1.27: U3.8 42.832,45.674 P1.1
NetP1_6: P1.6 U2.4 U2.8 | length 25.6
  Top Layer w0.254: U2.4 U2.8
  Top Layer w1.27: P1.6 52.832,46.149 U2.8
NetP2_1: P2.1 U6.4 U6.8 | length 27.6
  Top Layer w0.254: U6.4 U6.8
  Top Layer w1.27: U6.8 5.969,47.165 5.969,54.958 P2.1
NetP2_6: P2.6 U5.4 U5.8 | length 26.3
  Top Layer w0.254: U5.4 U5.8
  Top Layer w1.27: P2.6 19.812,54.864 23.876,50.8 U5.8
NetR1_1: R1.1 U2.5 | length 4.3
  Top Layer w0.254: U2.5 56.388,30.182 56.536,30.034 R1.1
NetR2_1: R2.1 U3.5 | length 4.2
  Top Layer w0.254: R2.1 42.291,30.161 U3.5
NetR3_1: R3.1 U2.6 | length 4.5
  Top Layer w0.254: U2.6 57.658,30.494 58.118,30.034 R3.1
NetR4_1: R4.1 U3.6 | length 4.2
  Top Layer w0.254: U3.6 43.815,33.909 R4.1
NetR5_1: R5.1 U5.5 | length 4.2
  Top Layer w0.254: U5.5 25.146,30.988 25.4,30.734 R5.1
NetR6_1: R6.1 U6.5 | length 4.6
  Top Layer w0.254: U6.5 10.541,30.923 11.107,30.357 11.107,30.182 11.255,30.034 R6.1
NetR7_1: R7.1 U5.6 | length 4.5
  Top Layer w0.254: U5.6 26.416,30.621 27.003,30.034 R7.1
NetR8_1: R8.1 U6.6 | length 4.8
  Top Layer w0.254: U6.6 11.811,31.129 12.906,30.034 R8.1
NetR9_1: R9.1 U2.3 | length 4.7
  Top Layer w0.254: U2.3 53.848,31.177 54.668,30.357 54.668,30.182 54.816,30.034 R9.1
NetR10_1: R10.1 U3.3 | length 4.5
  Top Layer w0.254: U3.3 39.751,30.988 40.063,30.676 40.063,30.182 40.211,30.034 R10.1
NetR11_1: R11.1 U5.3 | length 4.7
  Top Layer w0.254: U5.3 22.606,30.875 23.447,30.034 R11.1
NetR12_1: R12.1 U6.3 | length 5
  Top Layer w0.254: U6.3 8.001,31.637 9.604,30.034 R12.1
NetU2_2: U2.2 U4.15 | length 15.6
  Top Layer w0.254: U4.15 49.022,21.844 52.578,25.4 U2.2
NetU3_2: U3.2 U4.16 | length 20.3
  Top Layer w0.254: U3.2 38.481,26.924 39.624,25.781 43.688,25.781 47.752,21.717 U4.16
NetU4_17: U4.17 U5.2 | length 36.5
  Top Layer w0.254: U5.2 21.038,33.865 21.038,27.349 23.241,25.146 43.307,25.146 46.456,21.997 46.456,20.079 U4.17
NetU4_18: U4.18 U6.2 | length 50.6
  Top Layer w0.254: U6.2 6.731,25.781 7.874,24.638 42.926,24.638 45.212,22.352 U4.18
VCC: C1.2 C2.2 C5.1 C7.2 C8.2 C9.2 C10.2 C15.2 C16.2 C17.2 C18.2 J5.1 U1.1 U2.7 U3.7 U5.7 U6.7 | length 156.5
  Top Layer w0.254: J5.1 11.678,2.984 C1.2 C2.2 28.164,2.984 U1.1 ; U6.7 13.317,33.927 13.317,31.768 14.49,30.595 14.49,30.078 C18.2 ; U5.7 27.686,31.369 28.507,30.548 28.507,30.209 C16.2 ; U3.7 45.11,33.884 45.11,30.385 45.117,30.378 45.117,30.236 C10.2 ; U2.7 58.674,33.909 58.674,31.496 59.622,30.548 59.622,30.209 C8.2
  Top Layer w1.27: J5.1 8.977,10.398 7.344,12.031 C5.1 7.344,21.227 8.088,21.971 v1(32.258,21.971) ; C18.2 14.607,29.961 C17.2@16.127,29.961 ; C17.2 17.535,29.963 18.034,29.464 18.034,29.083 ; C16.2 C15.2 30.362,29.972 v1(32.258,29.972) ; C10.2 C9.2 47.634,29.963 v1(48.26,29.337) ; C8.2 59.986,29.845 62.248,29.845 62.992,29.101 v1(62.992,22.987) v1(62.992,21.971)
  Bottom Layer w1.27: v1(17.653,21.971) v1(17.653,29.083) ; v1(32.258,29.972) v1(32.258,28.194) v1(32.258,21.971) 48.26,21.971 ; v1(48.26,29.337) 48.26,21.971 ; v1(62.992,22.987) v1(62.992,21.971) 48.26,21.971
  other v1: 18.669,21.971 61.976,21.971 17.653,22.86 18.542,22.86 32.258,22.86 18.034,23.622 32.258,23.622 17.653,28.321 18.542,28.321 48.26,28.448 18.542,29.083 32.258,29.083 17.653,29.845 18.542,29.845 31.369,29.972 47.879,30.099
pads on no net: H1.1 H2.1 H3.1 H4.1 U4.6 U4.7 U4.8 U4.9 U4.11 U4.12 U4.13 U4.14

## Polygon pours and split planes (outlines as drawn)
GND on Top Layer "GND_L01_P026" (solid, remove dead copper, pour order 26): 0,0 0,61.849 66.04,61.849 66.04,0
VCC on Top Layer "VCC_L01_P022" (solid, remove dead copper, pour order 22): 47.625,28.321 47.879,28.067 48.768,28.067 48.895,28.194 48.895,29.337 47.879,30.353 47.625,30.353
VCC on Top Layer "VCC_L01_P021" (solid, pour order 21): 31.623,21.336 32.893,21.336 32.893,24.13 31.623,24.13
VCC on Top Layer "VCC_L01_P020" (solid, remove dead copper, pour order 20): 31.115,29.718 31.623,29.21 31.623,27.813 32.893,27.813 32.893,29.972 32.258,30.607 31.115,30.607
VCC on Top Layer "VCC_L01_P019" (solid, pour order 19): 61.976,21.336 61.722,21.59 61.722,22.606 63.627,22.606 63.627,21.59 63.373,21.336
VCC on Top Layer "VCC_L01_P016" (solid, remove dead copper, pour order 16): 17.018,23.876 17.526,24.384 18.542,24.384 19.05,23.876 19.05,22.479 18.669,22.098 18.669,21.971 17.653,21.971 17.018,22.606
VCC on Top Layer "VCC_L01_P012" (solid, remove dead copper, pour order 12): 18.796,30.607 19.05,30.099 19.05,28.321 18.669,27.94 17.399,27.94 16.383,29.337 16.383,30.607 17.399,30.607
VCC on Top Layer "VCC_L01_P005" (solid, pour order 5): 60.452,30.099 60.452,30.988 59.309,32.131 58.547,32.131 58.547,31.623 60.071,30.099
VCC on Top Layer "VCC_L01_P003" (solid, pour order 3): 44.45,32.385 44.45,32.004 45.11,31.344 45.11,30.242 45.831,30.242 45.847,30.226 45.847,31.401 45.06,32.385
VCC on Top Layer "VCC_L01_P002" (solid, pour order 2): 27.305,32.258 28.067,32.258 29.21,31.115 29.21,30.226 28.448,30.226 27.305,31.369
VCC on Top Layer "VCC_L01_P000" (solid, pour order 0): 14.097,30.226 12.573,32.131 13.462,32.131 15.113,30.226
GND on Bottom Layer "GND_L02_P027" (solid, remove dead copper, pour order 27): 0,0 0,61.849 66.04,61.849 66.04,0
VCC on Bottom Layer "VCC_L02_P011" (solid, remove dead copper, pour order 11): 17.018,21.971 17.526,21.463 18.796,21.463 19.05,21.717 19.05,30.099 18.669,30.48 17.399,30.48 17.018,30.099

## Keep-outs
Keep-Out Layer:
  the board outline again, w0.254

## Silkscreen, mask and mechanical layers (free items; w line width, h text height)
Top Overlay:
  drawing of 3 lines, arcs and shapes, not listed
  text "A" at 53.213,52.197 h1.52
  text "B" at 55.372,52.197 h1.52
  text "A" at 19.05,51.943 h1.52
  text "B" at 21.082,51.943 h1.52
  text "PWM1" at 63.881,14.224 h1.52 r270
  text "PWM4" at 56.642,14.097 h1.52 r270
  text "PWM3" at 59.055,14.097 h1.52 r270
  text "PWM2" at 61.468,14.097 h1.52 r270
  text "+" at 1.651,6.223 h3.81
Bottom Overlay:
  drawing of 419 lines, arcs and shapes, not listed

## Text inside footprints (layer, text, board x,y; h text height)
C5: Top Overlay "+" at 5.744,16.629 h1.22 r180